# Altium PCB pow_hw_2_V00.04.PcbDoc
Units mm, origin at the board's own origin, x right, y up, seen from the top; angles counter-clockwise.
Board outline 44.96 x 23.37 mm, 2 copper layers (Top Layer, Bottom Layer); 11 components, 9 nets, 39 pads, 9 vias.
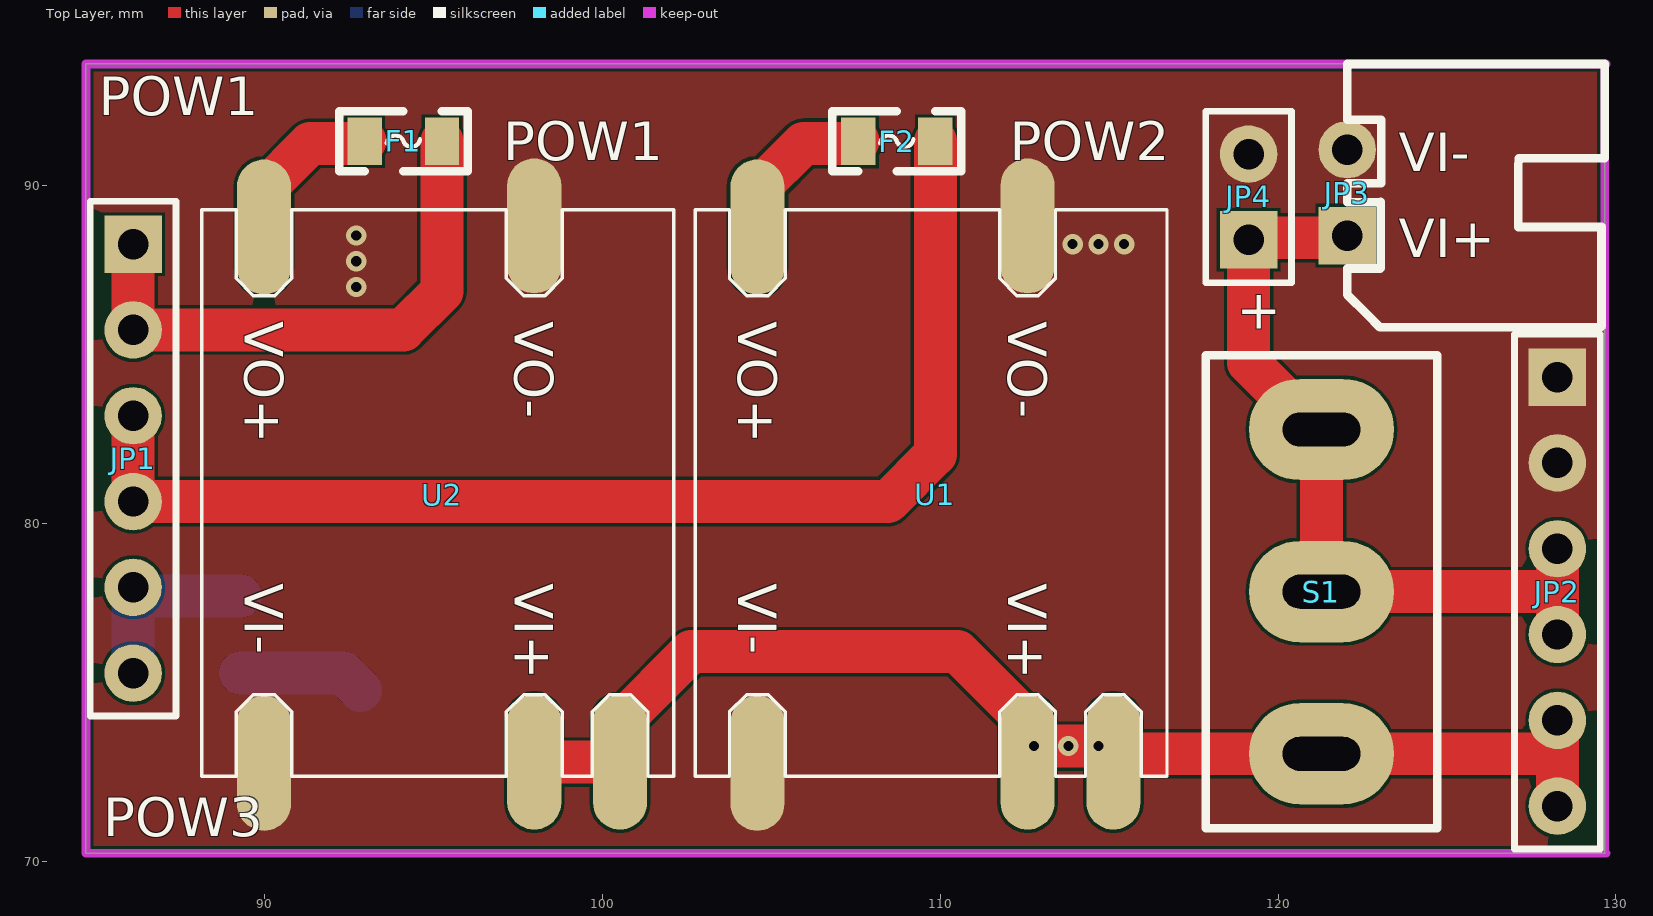
[diagram p0: Top Layer view]
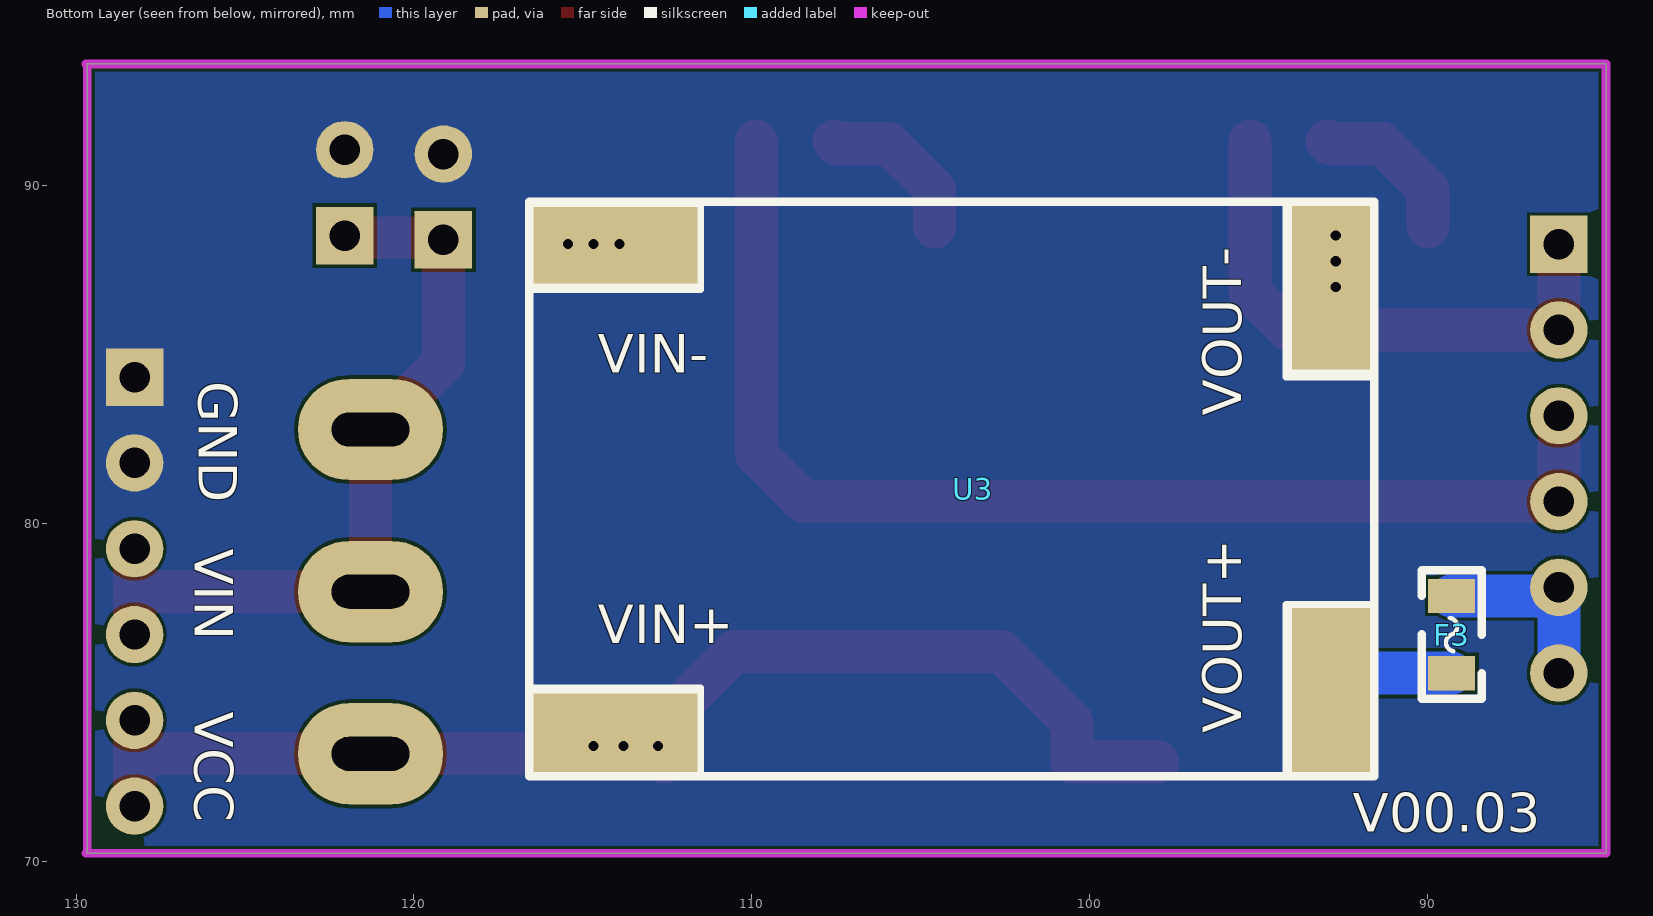
[diagram p1: Bottom Layer view, seen from below]

## Layer stack, top to bottom
Top Solder: solder mask 0.0102, Solder Resist, Dk 3.5
Top Layer: signal copper 0.0356
Dielectric 1: dielectric 0.32, FR-4, Dk 4.8
Bottom Layer: signal copper 0.0356
Bottom Solder: solder mask 0.0102, Solder Resist, Dk 3.5

## Board outline
84.709,70.231 129.667,70.231 129.667,93.599 84.709,93.599

## Design rules (kind name [scope] priority, off if disabled: settings)
Clearance [All] p1: gap=0.1 ignorepadtopadclearanceinfootprint=FALSE
PlaneConnect [All] p1: planeconnectstyle=Direct reliefexpansion=0.508 reliefentries=4 reliefconductorwidth=0.254 reliefairgap=0.254
PolygonConnect [All] p1: connectstyle=Direct reliefconductorwidth=0.254 reliefentries=4 polygonreliefangle="90 Angle" airgapwidth=0.254
RoutingVias [All] p1: holewidth=0.711 width=1.27 viastyle="Through Hole" minholewidth=0.711 minwidth=1.27 maxholewidth=0.711 maxwidth=1.27
SolderMaskExpansion [All] p1: expansion=0.102 istentingtop=FALSE
SupplyNets "Schematic Supply Nets_5" [InNet('VOUT_3')] p1: voltage=0.000
SupplyNets "Schematic Supply Nets_4" [InNet('GND')] p2: voltage=0.000
SupplyNets "Schematic Supply Nets_3" [InNet('VOUT_2')] p3: voltage=0.000
SupplyNets "Schematic Supply Nets_2" [InNet('VIN')] p4: voltage=0.000
SupplyNets "Schematic Supply Nets_1" [InNet('VOUT_1')] p5: voltage=0.000
SupplyNets "Schematic Supply Nets" [InNet('VCC')] p6: voltage=0.000
Width [All] p1: maxlimit=2.54 minlimit=0.254 preferedwidth=0.254 minimp=50.000000 maximp=50.000000 favimp=50.000000
29 further rules are at their usual default settings.

## Components (designator, comment, footprint, x,y, rotation, side; value= is the part's Value field where it differs from the comment)
F1 "MSMD200-6V 0.5A" "FU 0805" 94.107,91.313 r0 top
F2 "MSMD200-6V 0.5A" "FU 0805" 108.712,91.313 r0 top
F3 "MSMD200-12V 3A" "FU 0805" 89.281,76.708 r270 bottom
JP1 "HDR-1X6" HDR2.54-LI-6P 86.106,81.915 r270 top
JP2 "HDR-1X6" HDR2.54-LI-6P 128.27,77.978 r270 top
JP3 "HDR-1X2" XH2.54-WI-2P 122.047,89.789 r90 top
JP4 "HDR-1X2" HDR2.54-LI-2P 119.126,89.662 r90 top
S1 "SS-12F23" SS-12D10 121.285,77.978 r270 top
U1 "temp_dcdc" TEMP_DCDC 108.585,80.772 r270 top locked
U2 "temp_dcdc" TEMP_DCDC 93.98,80.772 r270 top locked
U3 "temp_dcdc" TEMP_12V 103.759,79.502 r180 bottom

## Footprints (in the part's own frame and the unit in brackets; to place one, negate y for a bottom-side part, rotate by r counter-clockwise, add the part's x,y. Pads: shape width x height; smd on the part's side, far side on the other; paste and mask are expansions set on the pad)
"FU 0805" [mil] "贴片保险丝"
  rect 40x55 smd: 1(-45,0) 2(45,0)
  silkscreen extent -75,-35 75,35, body extent -39,-24 39,24, height 20
HDR2.54-LI-2P [mm] "排针，2脚"
  rect 1.7x1.7 hole 0.9: 1(-1.27,0)
  round 1.7 hole 0.9: 2(1.27,0)
  silkscreen extent -2.54,-1.27 2.54,1.27, body extent -2.54,-1.27 2.54,1.27, height 8.5
HDR2.54-LI-6P [mm] "排针，6脚"
  rect 1.7x1.7 hole 0.9: 1(-6.35,0)
  round 1.7 hole 0.9: 2(-3.81,0) 3(-1.27,0) 4(1.27,0) 5(3.81,0) 6(6.35,0)
  silkscreen extent -7.62,-1.27 7.62,1.27, body extent -7.62,-1.27 7.62,1.27, height 8.5
SS-12D10 [mm] "脚距4.8mm"
  oval 3x4.3 hole 2.3 slot 1 at 0 deg: 1(-4.8,0) 2(0,0) 3(4.8,0)
  silkscreen extent -7,-3.43 7,3.43, body extent -6.71,-3.3 6.71,3.3, height 11.8
TEMP_12V [mm]
  rect 5x2.5 smd paste+0 mask+0.051: 2(-10.287,-5.715) 3(-10.287,8.763)
  rect 2.5x5 smd paste+0 mask+0.051: 4(10.922,-4.445) 5(10.922,7.493)
  silkscreen extent -12.83,-6.99 12.19,10.03
TEMP_DCDC [mm] "升降压模块"
  oval 4x1.6 smd paste+0 mask+0.051: 1(7.842,6.54) 2(7.842,4) 3(7.874,-4) 4(-8,-4) 5(-8.033,4)
  silkscreen extent -8.51,-5.84 8.26,8.13, body extent -8.47,-5.84 8.22,8.13, height 0.25
XH2.54-WI-2P [mm] "接插件，2P"
  rect 1.7x1.7 hole 0.9: 1(-1.27,0)
  round 1.7 hole 0.9: 2(1.27,0)
  silkscreen extent -3.99,-7.62 3.81,0, body extent -3.77,-7.35 3.77,0.35, height 5.73

## Part data
F1 F2 F3: library part FU, "贴片保险丝", BOM名称=贴片保险丝, 学习资源=www.ooocke.com, 版权归属=源创客
JP1 JP2: library part "Header 6", "6P接插件", BOM名称=6P接插件, 学习资源=www.ooocke.com, 版权归属=源创客
JP3 JP4: library part "Header 2", "2P接插件", BOM名称=2P接插件, 学习资源=www.ooocke.com, 版权归属=源创客
S1: library part SSW-1P, "1路拨动开关", BOM名称=波动开关, 学习资源=www.ooocke.com, 版权归属=源创客
U1 U2 U3: "升降压模块"

## Via types
v1: diameter 0.6, hole 0.3, Top Layer to Bottom Layer, 9 vias

## Nets (pads, with @x,y where several pads share a name; then routed paths per layer and width w, separated by ;. In a path a pad name is that pad's centre, name@x,y a point inside that pad or via, vN(x,y) a via of type N, cw(c..) or ccw(c..) an arc to the next point about the centre after c; other vN are vias at no path point)
GND: JP2.1 JP2.2 JP3.2 JP4.2 U1.3 U1.5 U2.3 U2.5 U3.3 U3.5
  other v1: 92.71,86.995 92.71,87.757 113.919,88.265 114.681,88.265 115.443,88.265 92.71,88.519
NetF1_2: F1.2 JP1.1 JP1.2 | length 16.6
  Top Layer w1.27: JP1.1 JP1.2 94.107,85.725 95.25,86.868 F1.2
NetF2_2: F2.2 JP1.3 JP1.4 | length 36
  Top Layer w1.27: JP1.4 JP1.3 ; JP1.4@86.222,80.645 108.458,80.645 109.855,82.042 F2.2
NetF3_1: F3.1 JP1.5 JP1.6 | length 5.8
  Bottom Layer w1.27: JP1.6 JP1.5 86.222,78.105 86.476,77.851 F3.1
VCC: JP2.5 JP2.6 S1.3 U1.1 U1.2 U2.1 U2.2 U3.2 | length 37.2
  Top Layer w1.27: U2.2 U2.1 100.52,74.104 102.616,76.2 110.515,76.2 112.477,74.238 112.477,73.038 U1.2 112.585,73.215 v1(112.776,73.406) ; U1.2@112.965,73.406 114.973,73.406 115.125,73.254 115.125,73.178 S1.3 128.27,73.178 ; JP2.6 128.27,73.178 ; JP2.5 128.27,73.178
  other v1: 113.792,73.406 114.681,73.406
VIN: JP2.3 JP2.4 JP3.1 JP4.1 S1.1 S1.2 | length 23.9
  Top Layer w1.27: JP3.1 121.983,88.456 119.189,88.456 JP4.1 119.126,84.755 121.103,82.778 S1.1 S1.2 128.27,77.978 ; JP2.4 128.27,77.978 ; JP2.3 128.27,77.978
VOUT_1: F2.1 U1.4 | length 4.7
  Top Layer w1.27: U1.4 104.585,89.883 105.952,91.249 107.505,91.249 F2.1
VOUT_2: F1.1 U2.4 | length 4.7
  Top Layer w1.27: U2.4 89.98,89.883 91.347,91.249 92.9,91.249 F1.1
VOUT_3: F3.2 U3.4 | length 3.8
  Bottom Layer w1.27: F3.2 92.329,75.565 U3.4

## Polygon pours and split planes (outlines as drawn)
GND on Top Layer "GND_L01_P000" (solid, pour order 0): 84.709,70.231 129.667,70.231 129.667,93.599 84.709,93.599
GND on Bottom Layer "GND_L02_P001" (solid, pour order 1): 84.709,70.231 129.667,70.231 129.667,93.599 84.709,93.599

## Keep-outs
Keep-Out Layer:
  lines w0.254: 129.667,70.231 129.667,93.599 ; 129.709,70.231 84.709,70.231 84.709,93.599 129.709,93.599

## Silkscreen, mask and mechanical layers (free items; w line width, h text height)
Top Overlay:
  text "POW1" at 85.09,92.075 h1.14
  text "POW1" at 97.066,90.755 h1.14
  text "POW2" at 112.052,90.755 h1.14
  text "VI-" at 123.571,90.424 h1.14
  text "VI+" at 123.571,87.884 h1.14
  text "+" at 118.777,85.758 h1.14
  text "POW3" at 85.217,70.739 h1.14
Bottom Overlay:
  text "GND" at 126.365,84.201 h1.14 r90
  text "VIN" at 126.492,79.248 h1.14 r90
  text "VCC" at 126.492,74.422 h1.14 r90
  text "V00.03" at 92.202,70.866 h1.14

## Text inside footprints (layer, text, board x,y; h text height)
U1: Top Overlay "VO+" at 104.013,85.979 h1.14 r270; Top Overlay "VO-" at 112.014,85.979 h1.14 r270; Top Overlay "VI-" at 104.013,78.232 h1.14 r270; Top Overlay "VI+" at 112.014,78.232 h1.14 r270
U2: Top Overlay "VI+" at 97.409,78.232 h1.14 r270; Top Overlay "VI-" at 89.408,78.232 h1.14 r270; Top Overlay "VO-" at 97.409,85.979 h1.14 r270; Top Overlay "VO+" at 89.408,85.979 h1.14 r270
U3: Bottom Overlay "VIN-" at 114.554,84.455 h1.14; Bottom Overlay "VIN+" at 114.554,76.454 h1.14; Bottom Overlay "VOUT+" at 95.504,73.787 h1.14 r270; Bottom Overlay "VOUT-" at 95.504,83.185 h1.14 r270